# EAGLE board boilup_v3 (EAGLE 8.7.1)
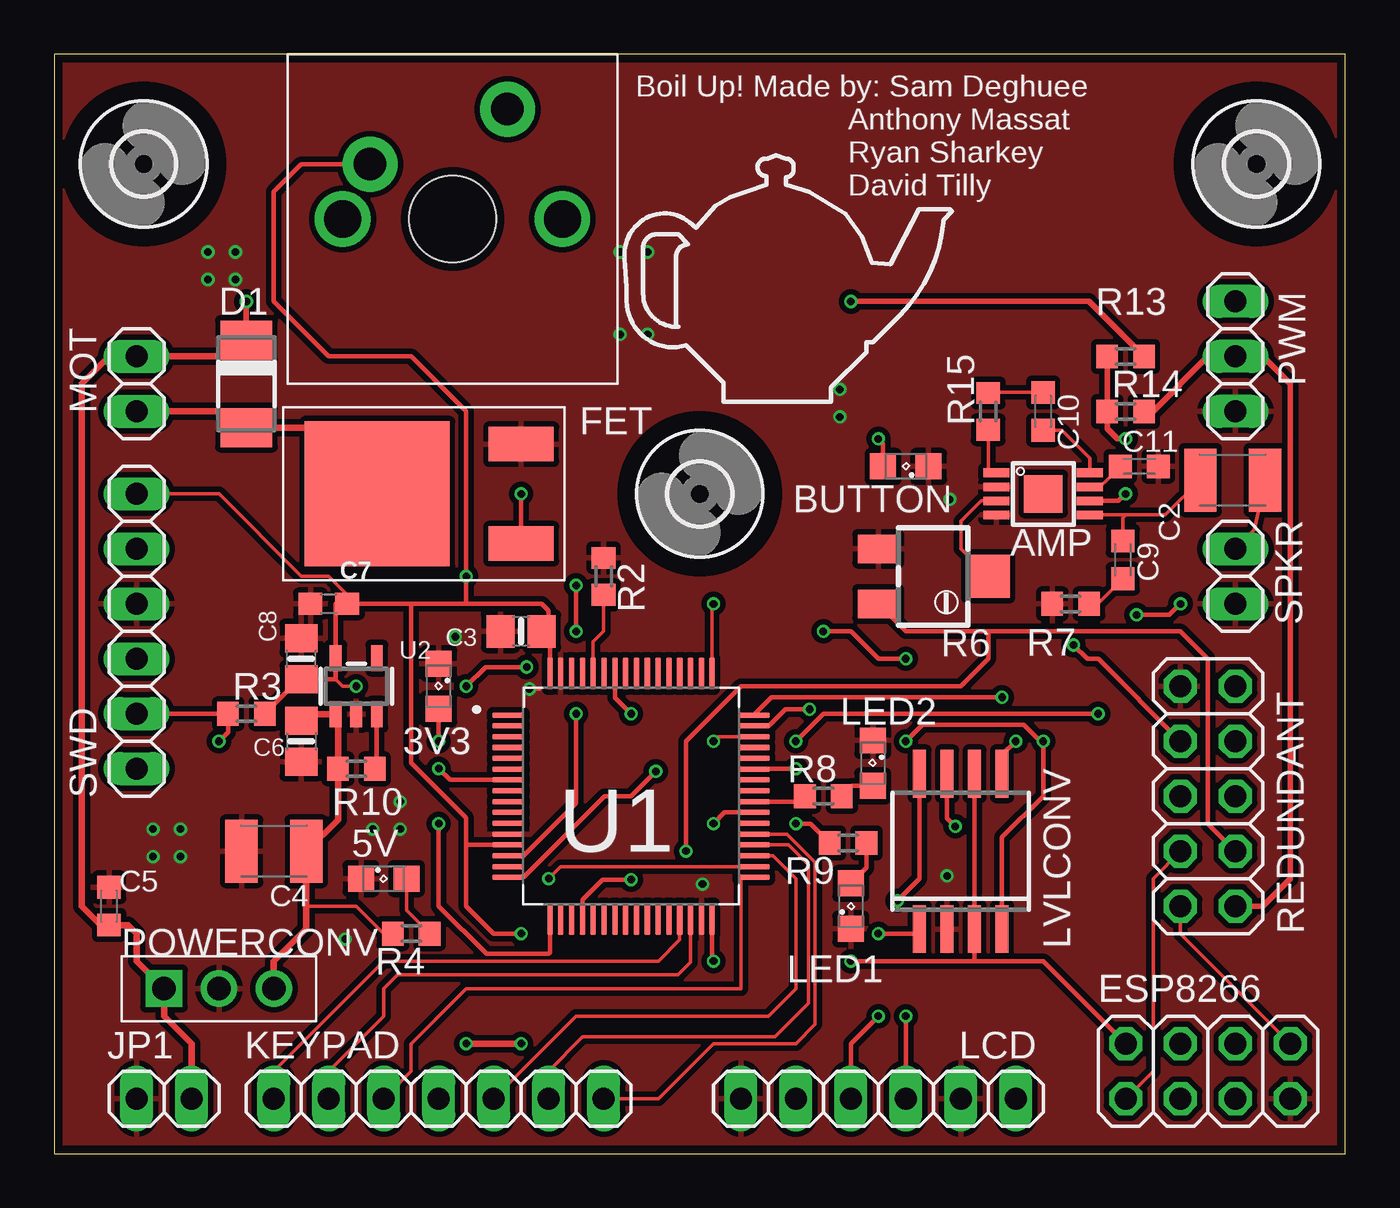
[diagram p0: board, top side]
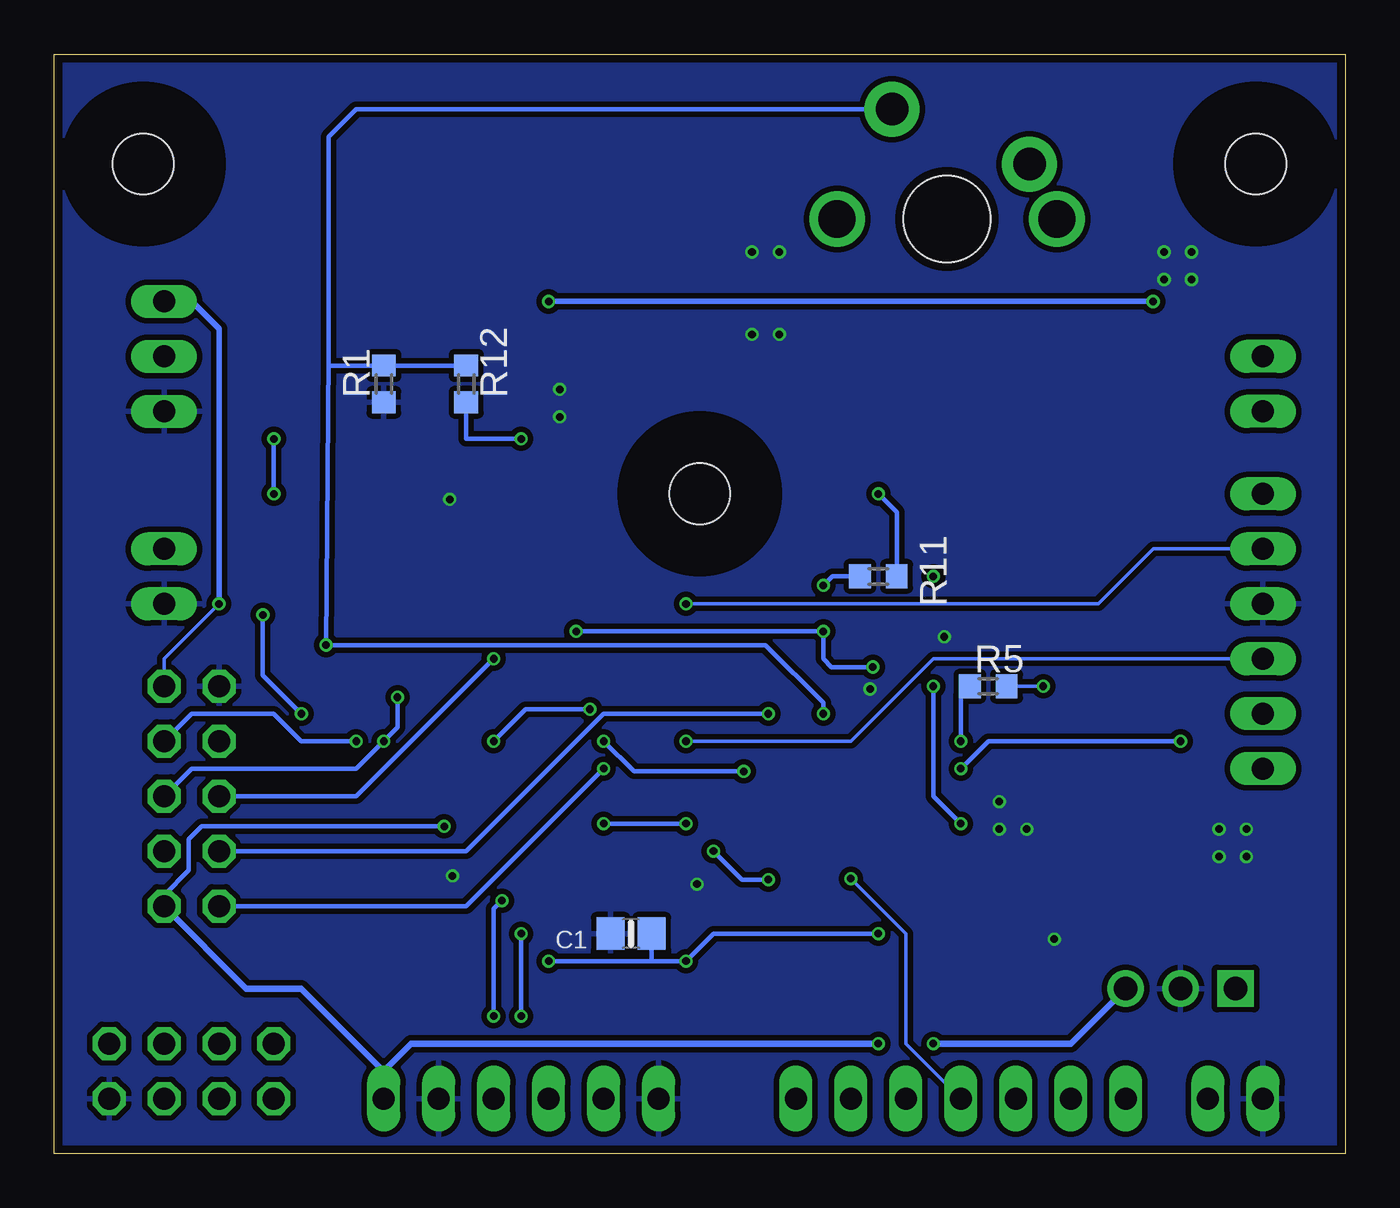
[diagram p1: board, bottom side, seen from below]

Size 59.69 x 50.8 mm. Coordinates in mm from the lower left corner, seen from the top.
Outline: 0,0 59.69,0 59.69,50.8 0,50.8 0,0
Copper layers (1*16): Top 0.035559375mm / dielectric 1.6mm / Bottom 0.035559375mm
Design rules "oshpark-2layer": minimum track width 6mil, minimum drill 10mil, track to track 6mil, track to pad 6mil, pad to pad 6mil, via to via 6mil, smd to smd 6mil, copper to edge 15mil, drill to drill 6mil, minimum pad ring 5mil, minimum via ring 5mil, stop-mask expansion 2.5mil, vias tented up to drill 0mil, thermal gap 10mil

## Footprints (pad centres in the part's own frame; a part is rotated, then mirrored left to right if it is on the bottom)
SML0805 = smd 1.2 x 1.2: A 1.05,0; C -1.05,0
S-PDSO-G08 = smd 0.4 x 1.2: 1 -0.975,-2.157; 2 -0.325,-2.157; 3 0.325,-2.157; 4 0.975,-2.157; 5 0.975,2.157; 6 0.325,2.157; 7 -0.325,2.157; 8 -0.975,2.157 | smd 1.73 x 1.78: TH 0,0
0805-NO = smd 1.3 x 1.5: 1 -0.95,0; 2 0.95,0
C1210K = smd 1.5 x 2.9: 1 -1.5,0; 2 1.5,0
C0603K = smd 1.05 x 1.08: 1 -0.875,0; 2 0.875,0
0603-NO = smd 1.1 x 1: 1 -0.85,0; 2 0.85,0
DO-214AC = smd 1.8 x 2.4: A 2.025,0; C -2.025,0
2X04 = drill 1.016 octagon: 1 -3.81,-1.27; 2 -3.81,1.27; 3 -1.27,-1.27; 4 -1.27,1.27; 5 1.27,-1.27; 6 1.27,1.27; 7 3.81,-1.27; 8 3.81,1.27
DPAK = smd 6.7 x 6.7: P$1 -6.65,0 | smd 3 x 1.6: P$2 0,2.3; P$3 0,-2.3
2,8 = hole 2.8: 0,0
1X02 = drill 1.016 long: 1 -1.27,0; 2 1.27,0
1X07 = drill 1.016 long: 1 -7.62,0; 2 -5.08,0; 3 -2.54,0; 4 0,0; 5 2.54,0; 6 5.08,0; 7 7.62,0
1X06 = drill 1.016 long: 1 -6.35,0; 2 -3.81,0; 3 -1.27,0; 4 1.27,0; 5 3.81,0; 6 6.35,0
SOP-08 = smd 0.6 x 2.2: 1 -1.905,-3.6; 2 -0.635,-3.6; 3 0.635,-3.6; 4 1.905,-3.6; 5 1.905,3.575; 6 0.635,3.575; 7 -0.635,3.575; 8 -1.905,3.575
TO-220 = drill 1.1 pad 1.7 square: P$1 -2.54,0 | drill 1.1 pad 1.7: P$2 0,0; P$3 2.54,0
1X03 = drill 1.016 long: 1 -2.54,0; 2 0,0; 3 2.54,0
R0603 = smd 1 x 1.1: 1 -0.85,0; 2 0.85,0
RTRIM3224X = smd 1.32 x 1.9: 1 -1.27,-2.54; 3 1.27,-2.54 | smd 2 x 2: 2 0,2.54
2X05 = drill 1.016 octagon: 1 -5.08,-1.27; 2 -5.08,1.27; 3 -2.54,-1.27; 4 -2.54,1.27; 5 0,-1.27; 6 0,1.27; 7 2.54,-1.27; 8 2.54,1.27; 9 5.08,-1.27; 10 5.08,1.27
QFP50P1200X1200X160-64N = smd 1.47 x 0.25: 1 -5.67,3.75; 2 -5.67,3.25; 3 -5.67,2.75; 4 -5.67,2.25; 5 -5.67,1.75; 6 -5.67,1.25; 7 -5.67,0.75; 8 -5.67,0.25; 9 -5.67,-0.25; 10 -5.67,-0.75; 11 -5.67,-1.25; 12 -5.67,-1.75; 13 -5.67,-2.25; 14 -5.67,-2.75; 15 -5.67,-3.25; 16 -5.67,-3.75; 33 5.67,-3.75; 34 5.67,-3.25; 35 5.67,-2.75; 36 5.67,-2.25; 37 5.67,-1.75; 38 5.67,-1.25; 39 5.67,-0.75; 40 5.67,-0.25; 41 5.67,0.25; 42 5.67,0.75; 43 5.67,1.25; 44 5.67,1.75; 45 5.67,2.25; 46 5.67,2.75; 47 5.67,3.25; 48 5.67,3.75 | smd 0.25 x 1.47: 17 -3.75,-5.67; 18 -3.25,-5.67; 19 -2.75,-5.67; 20 -2.25,-5.67; 21 -1.75,-5.67; 22 -1.25,-5.67; 23 -0.75,-5.67; 24 -0.25,-5.67; 25 0.25,-5.67; 26 0.75,-5.67; 27 1.25,-5.67; 28 1.75,-5.67; 29 2.25,-5.67; 30 2.75,-5.67; 31 3.25,-5.67; 32 3.75,-5.67; 49 3.75,5.67; 50 3.25,5.67; 51 2.75,5.67; 52 2.25,5.67; 53 1.75,5.67; 54 1.25,5.67; 55 0.75,5.67; 56 0.25,5.67; 57 -0.25,5.67; 58 -0.75,5.67; 59 -1.25,5.67; 60 -1.75,5.67; 61 -2.25,5.67; 62 -2.75,5.67; 63 -3.25,5.67; 64 -3.75,5.67
SOT23-5 = smd 0.55 x 1.2: 1 -0.95,-1.3; 2 0,-1.3; 3 0.95,-1.3; 4 0.95,1.3; 5 -0.95,1.3
CHERRY-MX = drill 1.714 pad 1.93: P$3 -5.08,0; P$4 5.08,0 | drill 1.5 pad 2.54: SW1 -3.81,2.54; SW2 2.54,5.08 | hole 4: 0,0

## Placement (x,y rotation side)
3V3  [SML0805]  17.78,21.59 270 top
5V  [SML0805]  15.24,12.7 0 top
AMP  LM386  [S-PDSO-G08]  45.72,30.48 270 top
BUTTON  [SML0805]  39.37,31.75 180 top
C1  10nF  [0805-NO]  33.02,10.16 180 bottom
C2  10uF  [C1210K]  54.48,31.11 0 top
C3  10nF  [0805-NO]  21.59,24.13 180 top
C4  100uF  [C1210K]  10.16,13.97 180 top
C5  10uF  [C0603K]  2.54,11.43 90 top
C6  10µF  [0805-NO]  11.43,19.05 270 top
C7  1uF  [0603-NO]  12.7,25.4 180 top
C8  10µF  [0805-NO]  11.43,22.86 90 top
C9  0.05uF  [C0603K]  49.4,27.43 270 top
C10  0.05uF  [C0603K]  45.72,34.29 270 top
C11  0.05uF  [C0603K]  50.16,31.75 0 top
D1  [DO-214AC]  8.89,35.56 270 top
ESP8266  [2X04]  53.34,3.81 0 top
FET  STD20NF06L  [DPAK]  21.59,30.48 0 top
H1  MOUNT-HOLE2.8  [2,8]  55.58,45.72 0 top
H2  MOUNT-HOLE2.8  [2,8]  4.14,45.72 0 top
H3  MOUNT-HOLE2.8  [2,8]  29.84,30.48 0 top
JP1  [1X02]  5.08,2.54 0 top
KEYPAD  [1X07]  17.78,2.54 0 top
LCD  [1X06]  38.1,2.54 0 top
LED1  [SML0805]  36.83,11.43 90 top
LED2  [SML0805]  37.85,18.03 270 top
LVLCONV  TXS0102  [SOP-08]  41.91,13.97 0 top
MOT  [1X02]  3.81,35.56 270 top
POWERCONV  TPSM842  [TO-220]  7.62,7.62 0 top
PWM  [1X03]  54.61,36.83 90 top
R1  [R0603]  44.45,35.56 90 bottom
R2  [R0603]  25.4,26.67 270 top
R3  [R0603]  8.89,20.32 0 top
R4  [R0603]  16.51,10.16 180 top
R5  [R0603]  16.51,21.59 0 bottom
R6  [RTRIM3224X]  40.64,26.67 270 top
R7  10  [R0603]  46.99,25.4 180 top
R8  [R0603]  35.56,16.51 180 top
R9  [R0603]  36.7,14.35 180 top
R10  100k  [R0603]  13.97,17.78 0 top
R11  [R0603]  21.59,26.67 0 bottom
R12  [R0603]  40.64,35.56 90 bottom
R13  0  [R0603]  49.53,36.83 180 top
R14  0  [R0603]  49.53,34.29 0 top
R15  10  [R0603]  43.18,34.29 90 top
REDUNDANT  [2X05]  53.34,16.51 90 top
SPKR  [1X02]  54.61,26.67 270 top
SWD  [1X06]  3.81,24.13 270 top
U1  STM32F0_LQFP64  [QFP50P1200X1200X160-64N]  26.67,16.51 0 top
U2  SPX3819-3.3  [SOT23-5]  13.97,21.59 0 top
U$1  CHERRY-MX  [CHERRY-MX]  18.41,43.18 0 top

## Library data of the parts
3V3 5V BUTTON LED1 LED2 = led
AMP FET LVLCONV POWERCONV U1 = smarttle
C1 C3 C6-C8 U2 = microbuilder
C2 C4 C5 C9-C11 R1-R9 R11-R15 = resistor
D1 = diode
ESP8266 JP1 KEYPAD LCD MOT PWM REDUNDANT SPKR SWD = pinhead
H1-H3 = holes
R10 = adafruit
U$1 = cherrymx

## Nets
+3V3: C1.1 C3.1 C7.1 C8.1 ESP8266.2 LVLCONV.3 LVLCONV.6 R3.2 R5.2 SWD.1 U1.13 U1.32 U1.64 U2.5 U$1.SW1
+5V: C4.1 C6.1 LCD.6 LVLCONV.7 POWERCONV.P$3 PWM.2 R4.2 R10.1 R14.2 REDUNDANT.1 U2.1
+12V: C5.1 D1.C JP1.2 MOT.1 POWERCONV.P$1 R13.1
BOOT0: R2.2 U1.60
CH_PD: ESP8266.6
COL1: KEYPAD.5 U1.35
COL2: KEYPAD.6 U1.36
COL3: KEYPAD.7 U1.37
DAC: R6.3 REDUNDANT.3 U1.20
EN: R10.2 U2.3
ESP_GPIO0: ESP8266.3
ESP_GPIO1: ESP8266.5
GND: 3V3.C 5V.C AMP.2 AMP.4 BUTTON.C C1.2 C3.2 C4.2 C5.2 C6.2 C7.2 C8.2 C11.2 ESP8266.7 FET.P$2 JP1.1 LCD.1 LCD.5 LED1.C LED2.C LVLCONV.2 POWERCONV.P$2 PWM.1 R1.1 R2.1 R6.1 R7.2 REDUNDANT.10 SPKR.2 SWD.3 U1.12 U1.31 U1.63 U2.2
I2C2_SCL: LVLCONV.4 REDUNDANT.7 U1.47
I2C2_SDA: LVLCONV.5 REDUNDANT.5 U1.48
LED3: R9.2 U1.39
LED4: R8.2 U1.40
MOT-: D1.A FET.P$1 MOT.2
N$1: LED2.A R8.1
N$2: LCD.2
N$3: LED1.A R9.1
N$4: FET.P$3 R11.2
N$5: BUTTON.A R12.1
N$6: C9.2 R7.1
N$7: 5V.A R4.1
N$8: AMP.5 C2.1 C9.1
N$9: AMP.3 R6.2
N$10: AMP.1 R15.1
N$11: AMP.8 C10.2
N$12: C10.1 R15.2
N$13: AMP.7 C11.1
N$14: 3V3.A R5.1
N$16: C2.2 SPKR.1
NRST: R3.1 SWD.5 U1.7
OPAMPSUPPLY: AMP.6 R13.2 R14.1
PUSH_BUTT: R1.2 R12.2 REDUNDANT.8 U1.14 U$1.SW2
ROW1: KEYPAD.1 U1.29
ROW2: KEYPAD.2 U1.30
ROW3: KEYPAD.3 U1.33
ROW4: KEYPAD.4 U1.34
RST: ESP8266.4
SCL: LCD.3 LVLCONV.1
SDA: LCD.4 LVLCONV.8
SWCLK: SWD.2 U1.49
SWDIO: SWD.4 U1.46
SWO: SWD.6
TIM2_CH3: PWM.3 REDUNDANT.9 U1.16
TIM2_CH4: R11.1 REDUNDANT.6 U1.17
USART_RX: ESP8266.8 REDUNDANT.2 U1.43
USART_TX: ESP8266.1 REDUNDANT.4 U1.58

## Tracks (layer width: path | path; a pad name or v marks a point on that pad's centre or on a via)
+3V3  (via drill 0.35)
  Top 0.152: SWD.1 7.62,30.48 11.43,26.67 12.7,26.67 13.97,25.4 | v13.97,21.59 13.34,21.59 13.02,21.91 | 19.05,14.26 19.05,13.97
  Top 0.203: 16.51,25.4 13.97,25.4 C7.1 13.02,25.4 U2.5 13.02,21.91 C8.1 11.33,21.91 R3.2 | 16.51,25.4 19.05,25.4 | 19.05,25.4 22.54,25.4 22.86,25.08 22.86,24.13 | C3.1 22.86,24.13 | 22.86,24.13 22.92,24.13 U1.64 | v30.48,8.89 30.42,8.89 U1.32 | ESP8266.2 45.72,8.89 42.55,8.89 | 42.55,8.89 v36.83,8.89 | 16.51,25.4 16.51,18.05 19.05,15.51 19.05,13.97 19.05,11.43 20.32,10.16 v21.59,10.16 | 20.3,14.26 U1.13 19.05,14.26 | 19.05,25.4 v19.05,26.67 19.05,34.29 16.51,36.83 12.7,36.83 10.16,39.37 10.16,44.45 11.43,45.72 U$1.SW1 | 42.55,8.89 LVLCONV.3 LVLCONV.6
  Bottom 0.152: R5.2 v13.97,21.59
  Bottom 0.203: C1.1 32.07,8.89 | 32.07,8.89 v30.48,8.89 29.21,10.16 v21.59,10.16 | v36.83,8.89 32.07,8.89
+5V  (via drill 0.35)
  Top 0.152: R4.2 15.24,10.16 13.97,11.43 11.66,11.43
  Top 0.203: 13.12,20.19 U2.1 | 11.72,20.29 C6.1 | LVLCONV.7 41.27,15.49 v41.66,15.11
  Top 0.254: 53.34,36.83 PWM.2 55.88,36.83 57.15,35.56 57.15,12.7 55.88,11.43 REDUNDANT.1 | R14.2 50.8,34.29
  Top 0.305: POWERCONV.P$3 10.16,8.89 11.66,10.39 11.66,11.43 C4.1 13.12,15.43 R10.1 13.12,20.19 | U2.1 11.72,20.29 | v19.05,5.08 v21.59,5.08 | 50.8,34.29 53.34,36.83
  Bottom 0.152: 44.07,2.54 LCD.6
  Bottom 0.203: v41.66,15.11 52.87,15.11 53.47,14.52 53.47,13.08 54.61,11.94 REDUNDANT.1
  Bottom 0.305: POWERCONV.P$3 12.7,5.08 v19.05,5.08 | v21.59,5.08 43.18,5.08 44.45,3.81 | REDUNDANT.1 50.8,7.62 48.26,7.62 44.45,3.81 | 44.45,3.81 LCD.6
+12V  (via drill 0.35)
  Top 0.254: R13.1 47.84,39.37 v36.83,39.37 | v8.89,39.37 D1.C
  Top 0.305: JP1.2 6.35,5.08 5.08,6.35 POWERCONV.P$1 3.81,8.89 3.81,10.16 3.42,10.55 C5.1 2.15,10.55 1.27,11.43 1.27,35.56 2.54,36.83 MOT.1 8.13,36.83 D1.C
  Bottom 0.254: v36.83,39.37 v8.89,39.37
BOOT0
  Top 0.152: U1.60 24.92,23.65 25.4,24.13 R2.2
COL1
  Top 0.152: U1.35 33.23,13.76 34.29,12.7 34.29,7.62 33.02,6.35 24.13,6.35 KEYPAD.5
COL2
  Top 0.152: U1.36 33.95,14.26 34.87,13.34 34.87,6.93 33.33,5.38 24.43,5.38 22.86,3.81 KEYPAD.6
COL3
  Top 0.152: U1.37 33.88,14.76 35.18,13.46 35.18,5.97 34.29,5.08 30.48,5.08 27.94,2.54 KEYPAD.7
DAC  (via drill 0.35)
  Top 0.203: REDUNDANT.3 53.34,15.24 53.34,22.86 52.07,24.13 43.18,24.13 | 43.18,24.13 39.37,24.13 R6.3 | v29.21,13.97 29.21,19.05 31.75,21.59 41.91,21.59 43.18,22.86 43.18,24.13 | U1.20 24.42,11.72 25.35,12.65 v26.67,12.65
  Bottom 0.203: v29.21,13.97 27.89,12.65 v26.67,12.65
EN
  Top 0.203: R10.2 14.92,17.78 U2.3
GND  (via drill 0.35)
  Top 0.152: 22.47,21.46 v21.97,21.46
  other vias: 29.97,12.45 7.11,41.66 8.38,41.66 7.11,40.39 8.38,40.39 36.32,35.31 36.32,34.04 41.4,30.23 14.73,14.99 16,16.26 13.46,9.91 16,14.99 4.57,14.99 5.84,14.99 4.57,13.72 5.84,13.72 26.16,41.66 27.43,41.66 26.16,37.85 27.43,37.85 18.54,23.88 41.27,12.83
  pour Top (isolate 0.254): 0,0 0,50.8 59.69,50.8 59.69,0
  pour Bottom (isolate 0.254): 0,0 0,50.8 59.69,50.8 59.69,0
I2C2_SCL  (via drill 0.35)
  Top 0.203: v34.92,20.53 33.81,20.53 33.04,19.76 U1.47 | v39.37,19.05 40.13,19.81 44.83,19.81 45.59,19.05 v45.72,19.05 45.72,16.51 43.81,14.61 LVLCONV.4
  Bottom 0.203: v34.92,20.53 37.89,20.53 v39.37,19.05 | REDUNDANT.7 53.34,20.32 49.53,20.32 48.26,19.05 v45.72,19.05
I2C2_SDA  (via drill 0.35)
  Top 0.203: U1.48 33.16,21.08 v43.81,21.08 | LVLCONV.5 43.81,18.41 v44.45,19.05
  Bottom 0.203: v43.81,21.08 43.81,19.68 v44.45,19.05 45.72,17.78 53.34,17.78 REDUNDANT.5
LED3  (via drill 0.35)
  Top 0.203: U1.39 31,15.76 v30.48,15.24 | v34.29,15.24 34.96,15.24 R9.2
  Bottom 0.203: v30.48,15.24 v34.29,15.24
LED4
  Top 0.203: R8.2 34.46,16.26 U1.40
MOT-
  Top 0.305: MOT.2 8.13,34.29 D1.A 13.15,33.53 FET.P$1
N$1
  Top 0.203: R8.1 36.88,16.98 LED2.A
N$3
  Top 0.203: LED1.A 37.55,13.2 R9.1
N$4  (via drill 0.35)
  Top 0.203: v21.59,30.48 FET.P$3
  Bottom 0.203: R11.2 20.74,29.63 v21.59,30.48
N$5  (via drill 0.35)
  Top 0.203: BUTTON.A 38.32,32.8 v38.1,33.02
  Bottom 0.203: v38.1,33.02 40.64,33.02 R12.1
N$6
  Top 0.152: R7.1 48.25,25.4 C9.2
N$7
  Top 0.152: R4.1 16.29,11.23 5V.A
N$8
  Top 0.152: AMP.5 49.53,29.5 | 49.53,29.5 51.37,29.5 C2.1 | C9.1 49.4,29.38 49.53,29.5
N$9
  Top 0.152: AMP.3 42.85,30.16 41.91,29.21 41.91,27.94 R6.2
N$10
  Top 0.152: AMP.1 43.18,31.45 R15.1
N$11
  Top 0.152: AMP.8 47.88,32.13 46.59,33.41 C10.2
N$12
  Top 0.152: C10.1 43.2,35.16 R15.2
N$13
  Top 0.152: C11.1 48.7,31.16 48.35,30.8 AMP.7
N$14  (via drill 0.35)
  Top 0.203: v17.78,19.05 3V3.A
  Bottom 0.203: R5.1 17.78,21.17 v17.78,19.05
N$16
  Top 0.152: SPKR.1 55.48,28.82 C2.2
NRST  (via drill 0.35)
  Top 0.203: SWD.5 R3.1 8.04,19.47 v7.62,19.05 | U1.7 18.3,17.26 v17.78,17.78
  Bottom 0.203: v17.78,17.78 16.51,19.05 v7.62,19.05
OPAMPSUPPLY  (via drill 0.35)
  Top 0.203: AMP.6 49.2,30.16 v49.53,30.48
  Top 0.254: R13.2 R14.1 48.68,33.49 49.15,33.02 v49.53,33.02
  Bottom 0.203: v49.53,30.48 v49.53,33.02
PUSH_BUTT  (via drill 0.35)
  Top 0.203: REDUNDANT.8 48.26,22.86 47.75,22.86 v47.12,23.5 | v24.13,20.32 24.13,16.19 21.7,13.76 U1.14
  Bottom 0.203: R12.2 R1.2 47,36.41 47,36.83 | 47,36.83 v47.12,23.5 26.8,23.5 24.13,20.83 v24.13,20.32 | 47,36.83 46.99,38.1 46.99,46.99 45.72,48.26 U$1.SW2
ROW1
  Top 0.152: U1.29 28.92,9.87 27.94,8.89 15.24,8.89 10.16,3.81 KEYPAD.1
ROW2
  Top 0.152: U1.30 29.42,8.85 28.83,8.26 15.88,8.26 15.24,7.62 15.24,6.35 12.7,3.81 KEYPAD.2
ROW3
  Top 0.152: U1.33 31.75,12.76 31.75,7.62 19.05,7.62 16.51,5.08 16.51,3.81 KEYPAD.3
ROW4  (via drill 0.35)
  Top 0.152: U1.34 23.42,13.26 v22.86,12.7
  Bottom 0.152: v22.86,12.7 20.32,10.16 20.32,5.08 KEYPAD.4
SCL  (via drill 0.35)
  Top 0.203: LVLCONV.1 39.8,10.16 v38.1,10.16 | v38.1,6.35 36.83,5.08 LCD.3
  Bottom 0.203: v38.1,10.16 v38.1,6.35
SDA  (via drill 0.35)
  Top 0.203: LCD.4 v39.37,6.35 | LVLCONV.8 40.01,12.7 v38.99,11.68
  Bottom 0.203: v38.99,11.68 39.37,11.3 v39.37,6.35
SWCLK  (via drill 0.35)
  Top 0.152: U1.49 30.42,25.34 v30.48,25.4
  Bottom 0.152: SWD.2 8.89,27.94 11.43,25.4 v30.48,25.4
SWDIO  (via drill 0.35)
  Top 0.152: v30.48,19.05 30.69,19.26 U1.46
  Bottom 0.152: SWD.4 19.05,22.86 22.86,19.05 v30.48,19.05
TIM2_CH3  (via drill 0.35)
  Top 0.203: v34.29,19.05 35.56,20.32 v48.26,20.32 | v50.04,24.89 51.56,24.89 v52.07,25.4 | U1.16 21.7,12.76 25.45,16.51 26.67,16.51 v27.81,17.65
  Bottom 0.152: REDUNDANT.9 54.61,22.86 v52.07,25.4
  Bottom 0.203: v27.81,17.65 32.89,17.65 v34.29,19.05 | v48.26,20.32 50.04,22.1 v50.04,24.89
  Bottom 0.254: v52.07,25.4 52.07,38.1 53.34,39.37 PWM.3
TIM2_CH4  (via drill 0.35)
  Top 0.203: U1.17 22.92,9.28 22.86,9.22 19.99,9.22 17.78,11.43 v17.78,15.24 | v19.05,21.59 19.94,22.48 v21.84,22.48 | v24.13,26.25 v24.13,24.13 | v35.56,24.13 36.83,24.13 38.1,22.86 v39.37,22.86
  Bottom 0.203: v17.78,15.24 19.05,16.51 v19.05,21.59 | v21.84,22.48 23.75,22.48 24.13,22.86 v24.13,24.13 v35.56,24.13 | REDUNDANT.6 45.72,16.51 v39.37,22.86 | R11.1 23.71,26.67 v24.13,26.25
USART_RX  (via drill 0.35)
  Top 0.152: REDUNDANT.2 52.07,10.16 ESP8266.8
  Top 0.203: v34.29,17.78 32.36,17.78 U1.43
  Bottom 0.203: REDUNDANT.2 40.64,11.43 v34.29,17.78
USART_TX  (via drill 0.35)
  Top 0.152: ESP8266.1 50.8,3.81 50.8,12.7 REDUNDANT.4
  Top 0.203: v26.67,20.32 25.92,21.07 U1.58
  Bottom 0.203: REDUNDANT.4 40.64,13.97 34.29,20.32 v26.67,20.32

## Text on the board
tNames: Boil Up! Made by: Sam Deghuee / Anthony Massat / Ryan Sharkey / David Tilly